# Altium PCB CR99004.PcbDoc
Units mm, origin at the board's own origin, x right, y up, seen from the top; angles counter-clockwise.
Board outline 18 x 32 mm, 4 copper layers (L 01, L 02, L 03, L 04), stack 2.023 mm thick; 12 components, 12 nets, 41 pads, 17 vias.
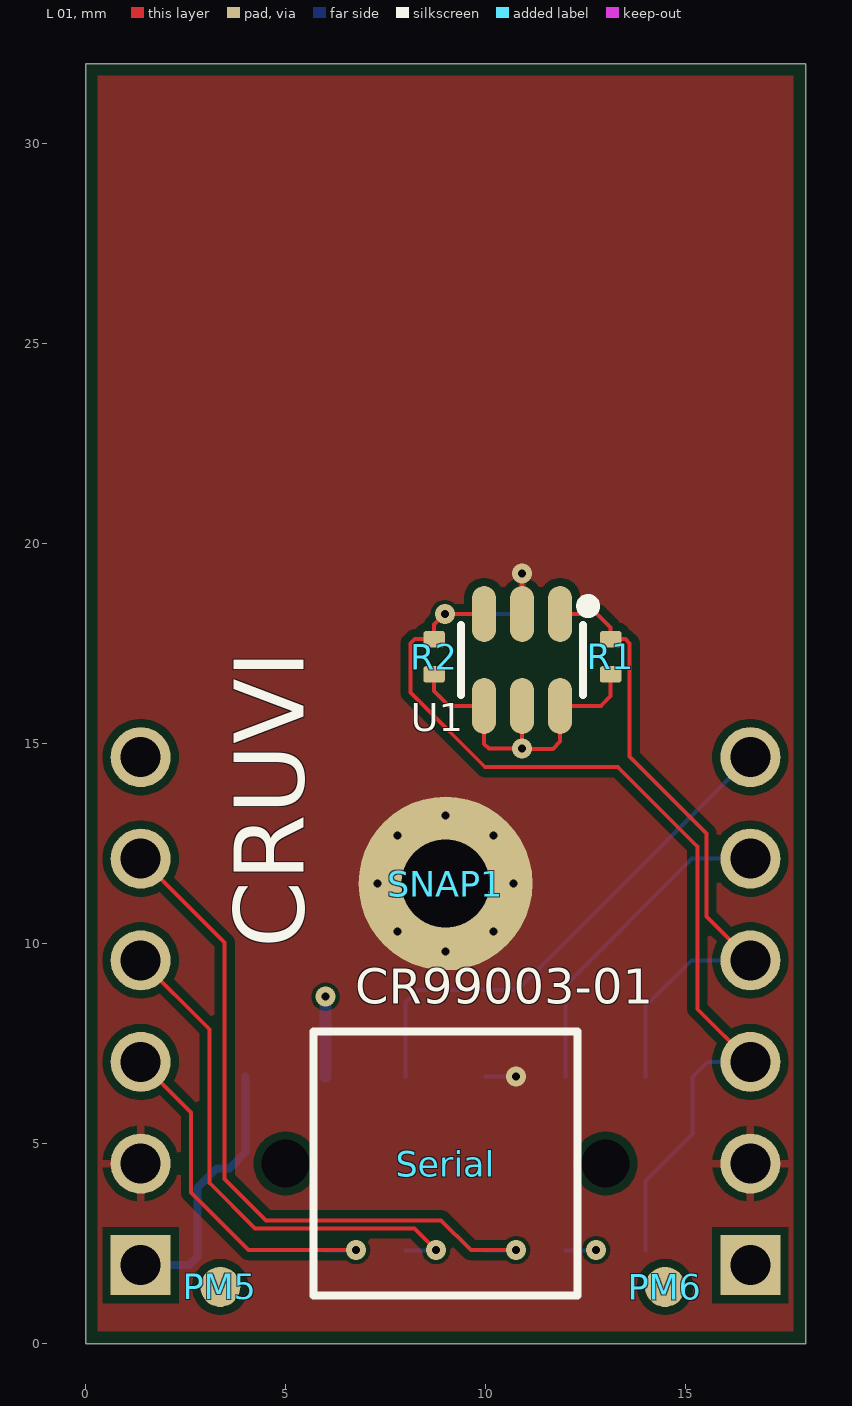
[diagram p0: L 01 view]
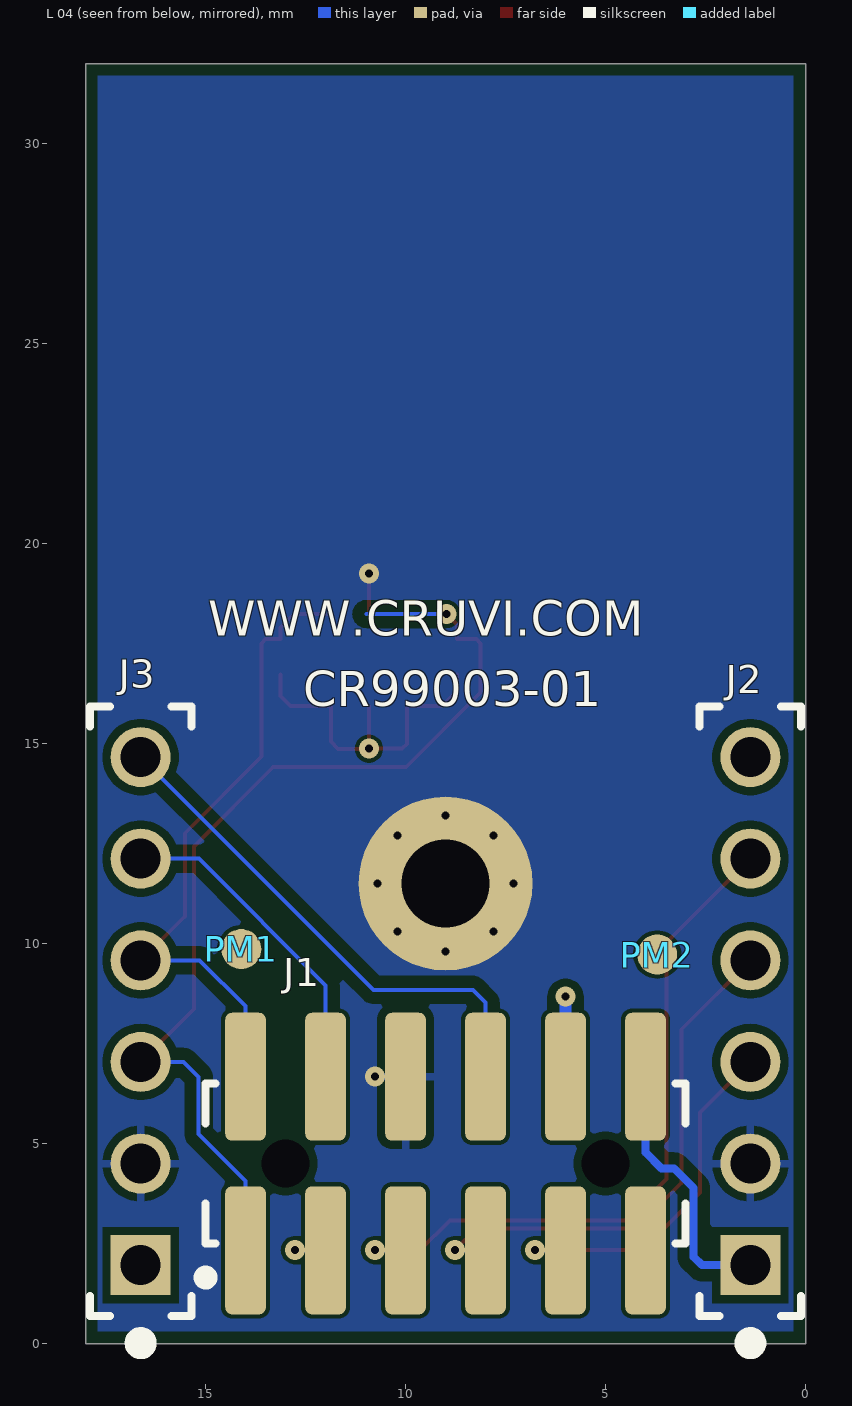
[diagram p1: L 04 view, seen from below]
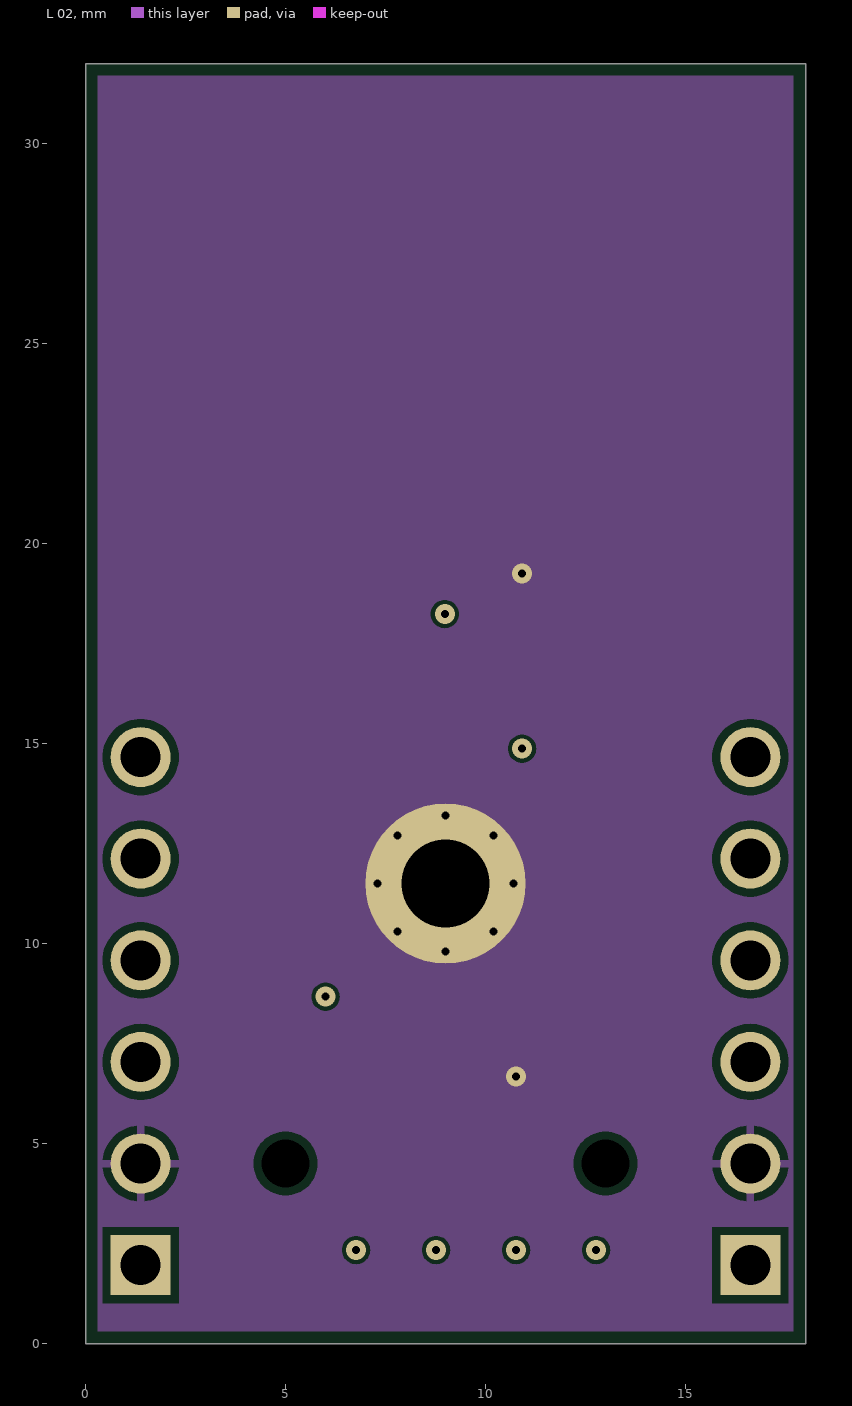
[diagram p2: L 02]
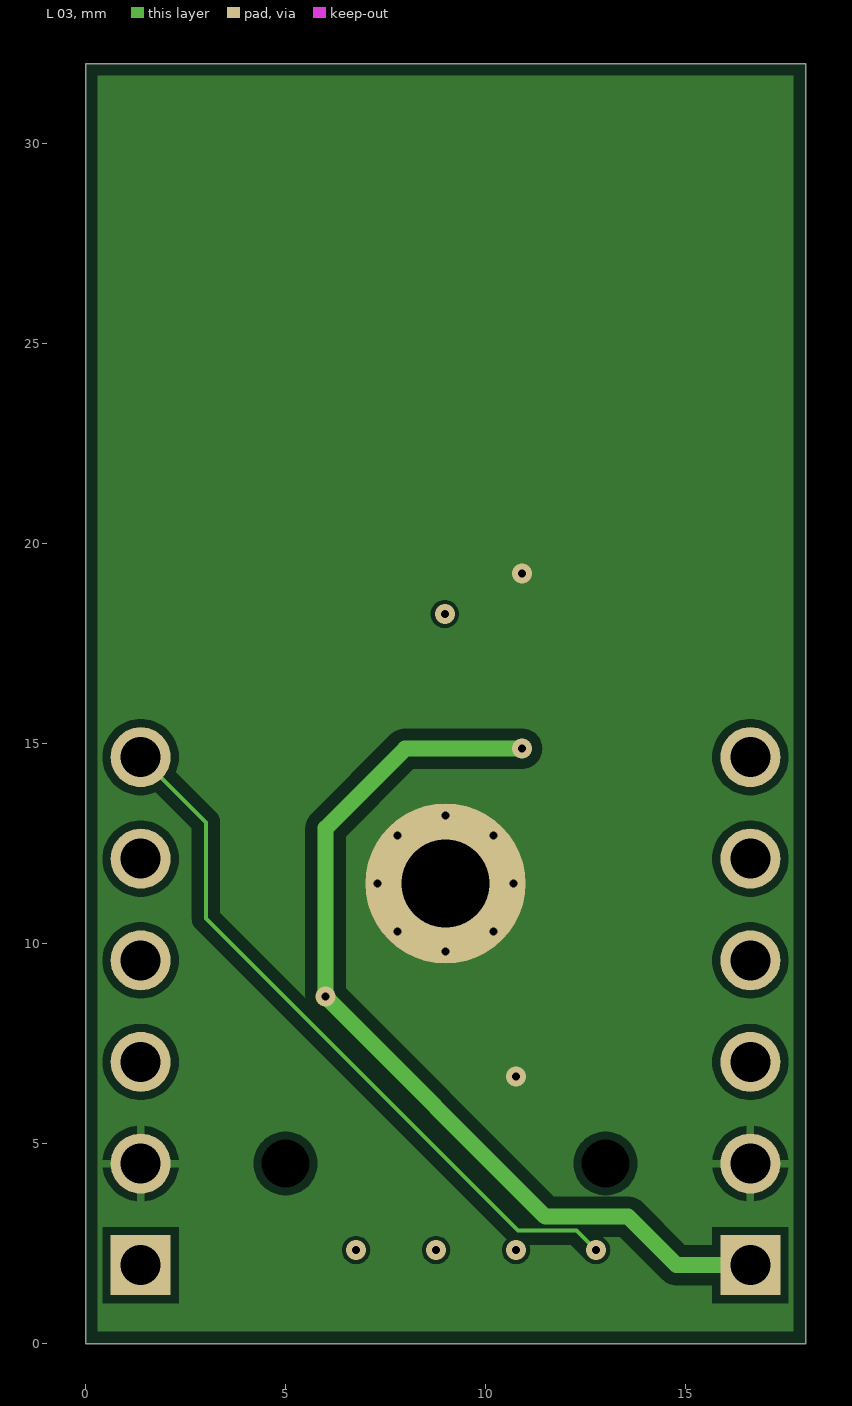
[diagram p3: L 03]
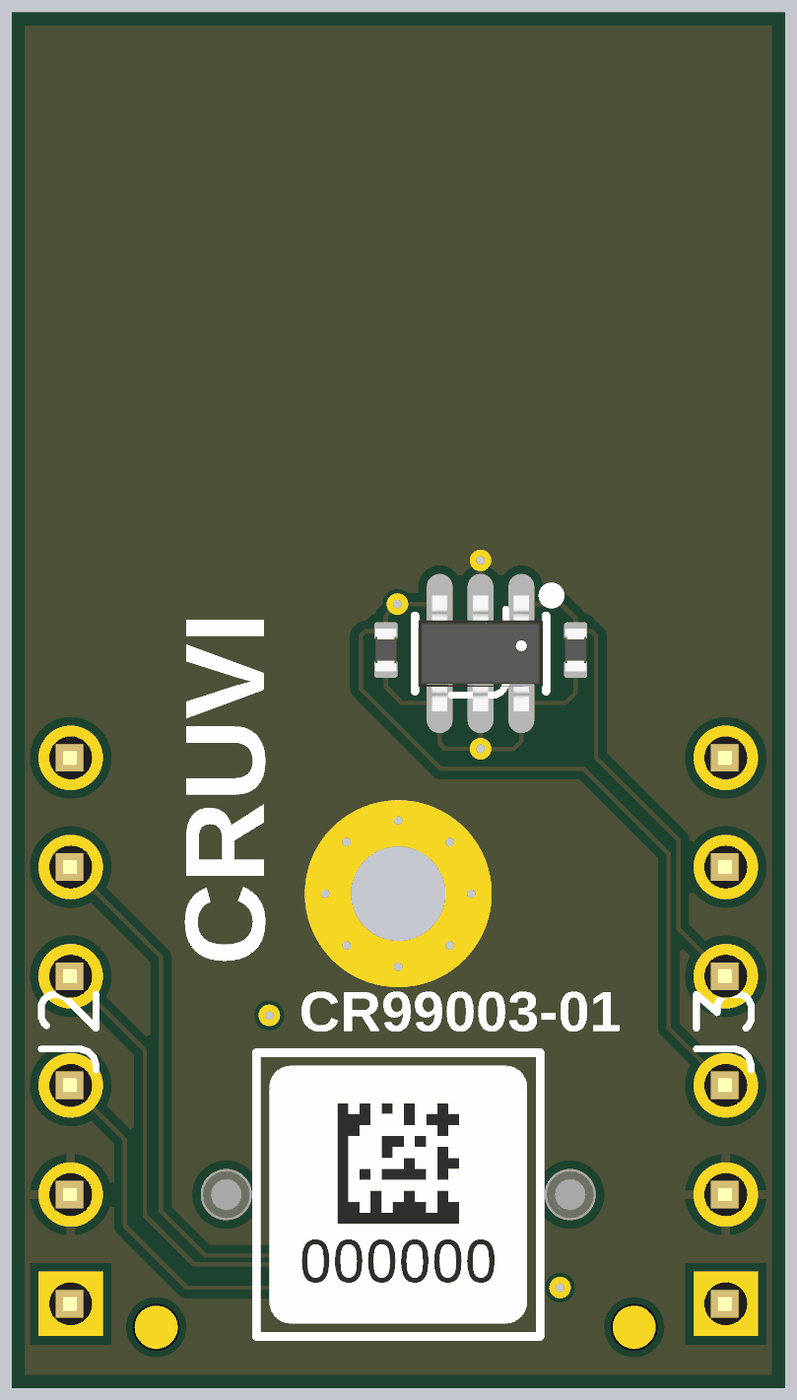
[diagram p4: 3D render of the assembled board from above, using the file's embedded part models]
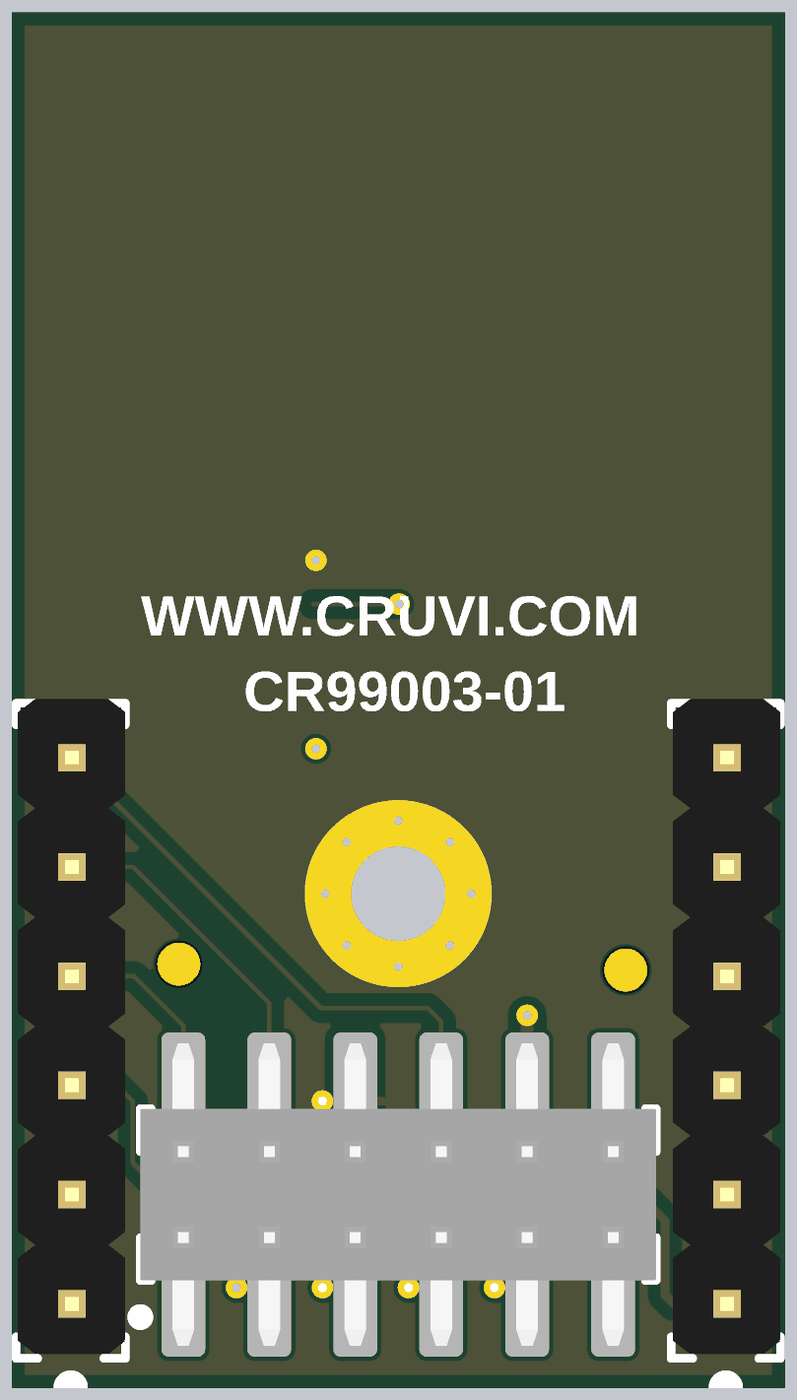
[diagram p5: 3D render of the assembled board from below, using the file's embedded part models]

## Layer stack, top to bottom
Top Solder: solder mask 0.035, Solder Resist, Dk 3.5
L 01: signal copper 0.035
Dielectric1: core 1.5, FR-4, Dk 4.2
L 02: signal copper 0.036
Dielectric 3: prepreg 0.127, Dk 4.2
L 03: signal copper 0.036
Dielectric 2: core 0.254, Dk 4.2
L 04: signal copper 0.035
Bottom Solder: solder mask 0.035, Solder Resist, Dk 3.5

## Board outline
0,0 18,0 18,32 0,32

## Design rules (kind name [scope] priority, off if disabled: settings)
BoardOutlineClearance [All] p1: gap=0.3
Clearance Clearance_topbotPoly [InPolygon vs (OnLayer('Multi-Layer') and IsPad) or OnLayer('L 01') or OnLayer('L 06')] p1: gap=0.2
Clearance [All] p2: gap=0.099 except(0.3: Track-Poly Poly-Poly Poly-Region)
ComponentClearance "ComponentClearance_J2PM\"" [(InComponent('J2')) vs (InComponent('PM2'))] p1: gap=-4 collisioncheckmode=3 verticalgap=-1 showdistances=FALSE
ComponentClearance ComponentClearance_H3U7 [(InComponent('H3')) vs (InComponent('U7'))] p2: gap=-0.5 collisioncheckmode=3 verticalgap=-1 showdistances=FALSE
ComponentClearance ComponentClearance_-0.5mm [HasFootprint('FIDU-DOT - small') OR HasFootprint('NetTieTOP_D35mm')or HasFootprint('MHole3_2mm')] p3: gap=-0.5 collisioncheckmode=3 verticalgap=-0.013 showdistances=FALSE
ComponentClearance [All] p4: gap=-0.05 collisioncheckmode=3 verticalgap=0.5 showdistances=TRUE
DiffPairsRouting DiffPairsRouting_D80 [InNetClass('DDR_D80')] p1: maxlimit=0.254 minlimit=0.1 mostfreqgap=0.254 toplayer_mingap=0.12 toplayer_prefgap=0.12 toplayer_minwidth=0.09 toplayer_maxwidth=0.381 toplayer_prefwidth=0.09 midlayer1_prefgap=0.1 midlayer1_minwidth=0.11 midlayer1_maxwidth=0.381 midlayer1_prefwidth=0.11 midlayer2_mingap=0.254 midlayer2_minwidth=0.381 midlayer2_maxwidth=0.381 midlayer2_prefwidth=0.381 bottomlayer_mingap=0.12 bottomlayer_prefgap=0.12 bottomlayer_minwidth=0.09 bottomlayer_maxwidth=0.381 bottomlayer_prefwidth=0.09 maxuncoupledlength=12.7
DiffPairsRouting [All] p2: maxlimit=1 minlimit=0.12 mostfreqgap=1 toplayer_maxgap=0.12 toplayer_prefgap=0.12 toplayer_minwidth=0.1 toplayer_maxwidth=0.15 toplayer_prefwidth=0.1 midlayer1_mingap=0.16 midlayer1_maxgap=0.16 midlayer1_prefgap=0.16 midlayer1_minwidth=0.1 midlayer1_maxwidth=0.11 midlayer1_prefwidth=0.1 midlayer2_mingap=1 midlayer2_minwidth=0.381 midlayer2_maxwidth=0.381 midlayer2_prefwidth=0.381 bottomlayer_maxgap=0.12 bottomlayer_prefgap=0.12 bottomlayer_minwidth=0.1 bottomlayer_maxwidth=0.3 bottomlayer_prefwidth=0.1 maxuncoupledlength=30
FabricationTestPointUsage TestPointUsage [All] p1: valid=0 allowmultiple=FALSE
FabricationTestpoint Testpoint [(IsPad And (OnTopLayer Or OnBottomLayer))] p1: side=3 testpointundercomponent=TRUE minsize=1.016 maxsize=2.54 preferedsize=1.524 minholesize=0 maxholesize=1.016 preferedholesize=0.813 testpointgrid=0.025 allowsidetop=TRUE allowsidebottom=TRUE usegrid=TRUE gridtolerance=0
FanoutControl Fanout_Small [All] p1 off: bgadir=Out bgaviamode=Centered fanoutstyle=Auto fanoutdirection=Alternating viagrid=0.025 // Protel DXP Scope 1 Expression Was: (CompPinCount < 5)   Fanout_Small (Default Rule)
FanoutControl Fanout_Default [All] p2: bgadir=Out bgaviamode=Centered fanoutstyle=Auto fanoutdirection=Alternating viagrid=0.025 // Fanout_Default (Default Rule)
FanoutControl Fanout_SOIC [All] p3 off: bgadir=Out bgaviamode=Centered fanoutstyle=Auto fanoutdirection=Alternating viagrid=0.025 // Protel DXP Scope 1 Expression Was: IsSOIC   Fanout_SOIC (Default Rule)
FanoutControl Fanout_BGA [All] p4 off: bgadir=Out bgaviamode=Centered fanoutstyle=Auto fanoutdirection=Alternating viagrid=0.025 // Protel DXP Scope 1 Expression Was: IsBGA   Fanout_BGA (Default Rule)
FanoutControl Fanout_LCC [All] p5 off: bgadir=Out bgaviamode=Centered fanoutstyle=Auto fanoutdirection=Alternating viagrid=0.025 // Protel DXP Scope 1 Expression Was: IsLCC   Fanout_LCC (Default Rule)
HoleSize [All] p1: absolutevalues=TRUE maxlimit=4 minlimit=0.2 maxpercent=80.000 minpercent=20.000
Length Lendht22mm [(InDifferentialPairClass('Lendht22mm'))] p1: maxlimit=22.2 minlimit=21.8
MinimumAnnularRing [All] p1: minimumring=0.124
MinimumSolderMaskSliver [All] p1: minsoldermaskwidth=0.2
PermittedLayers PermittedLayers-CAP3225 [(HasFootprint('CAPC3216N'))] p1: toplayerpermitted=TRUE bottomlayerpermitted=FALSE
PlaneClearance [All] p1: clearance=0.25
PlaneConnect PlaneConnect_Via [IsVia] p1: planeconnectstyle=Direct reliefexpansion=0.508 reliefentries=4 reliefconductorwidth=0.254 reliefairgap=0.254
PlaneConnect [All] p2: planeconnectstyle=Relief reliefexpansion=0.5 reliefentries=4 reliefconductorwidth=0.2 reliefairgap=0.25
PolygonConnect mhole [HoleSize > 2.1] p1: connectstyle=Direct reliefconductorwidth=0.254 reliefentries=4 polygonreliefangle="90 Angle" airgapwidth=0.254
PolygonConnect Direct_J2 [HasFootprint('STIFTLEISTE2_54 OG 1R-14')] p2: connectstyle=Relief reliefconductorwidth=0.254 reliefentries=4 polygonreliefangle="45 Angle" airgapwidth=0.254
PolygonConnect PolygonConnect_TopRilief [InPolygonClass('TopConnect')] p3: connectstyle=Relief reliefconductorwidth=0.254 reliefentries=4 polygonreliefangle="90 Angle" airgapwidth=0.2
PolygonConnect PolygonConnect_Direct [(HasFootprint('MHole2_7mm')) or IsVia or InComponent('H1') or InComponent('H2') or InComponent('H3') or InComponent('H4')] p4: connectstyle=Direct reliefconductorwidth=0.254 reliefentries=4 polygonreliefangle="90 Angle" airgapwidth=0.254 // Protel DXP Scope 1 Expression Was: IsVia
PolygonConnect PolygonConnect_Direct_TP [HasFootprint('TP_0.8mm')] p5: connectstyle=Direct reliefconductorwidth=0.254 reliefentries=4 polygonreliefangle="90 Angle" airgapwidth=0.254 // Protel DXP Scope 1 Expression Was: IsVia
PolygonConnect [All] p6: connectstyle=Relief reliefconductorwidth=0.2 reliefentries=4 polygonreliefangle="90 Angle" airgapwidth=0.2
RoutingLayers "RoutingLayers_impedance control" [(InDifferentialPairClass('All Differential Pairs') OR InNetClass('D100-15') OR InNetClass('D100-25') OR InNetClass('D100-33') OR InNetClass('S50') OR InNetClass('S50-25') OR InNetClass('S50-33') OR InNetClass('S60-15'))] p1: top layer_v5=TRUE mid layer 1_v5=TRUE mid layer 2_v5=TRUE bottom layer_v5=TRUE
RoutingLayers [All] p2: top layer_v5=TRUE mid layer 1_v5=TRUE mid layer 2_v5=TRUE bottom layer_v5=TRUE
RoutingVias [All] p1: holewidth=0.2 width=0.5 viastyle="Through Hole" minholewidth=0.2 minwidth=0.5 maxholewidth=1 maxwidth=1.5
SMDNeckDown SMDNeckDown_80% [All] p1: percent=95.000
SMDToPlane [All] p1: distance=39370
SilkToBoardRegionClearance [All] p1 off:
SilkToSilkClearance [All] p1: silktosilkclearance=0.01
SilkToSolderMaskClearance SilkscreenOverComponentPads [IsPad] p1: minsilkscreentomaskgap=0.01 clearancetoexposedcopper=TRUE
SolderMaskExpansion SolderMaskExpansion_Via [IsVia] p1: expansion=-0.15
SolderMaskExpansion [All] p2: expansion=0
Width Width_S40 [InNetClass('DDR_S40')] p1: maxlimit=0.254 minlimit=0.1 preferedwidth=0.254 toplayer_maxwidth=0.15 toplayer_prefwidth=0.15 midlayer1_maxwidth=0.18 midlayer1_prefwidth=0.18 midlayer2_minwidth=0.15 bottomlayer_maxwidth=0.15 bottomlayer_prefwidth=0.15 minimp=50.000000 maximp=50.000000 favimp=50.000000
Width Logo [(InComponent('LOGO*'))] p2: maxlimit=0.254 minlimit=0.001 preferedwidth=0.254 // Protel DXP Scope 1 Expression Was: (InComponent('LOGO?'))
Width All [All] p3: maxlimit=3 minlimit=0.1 preferedwidth=0.1 minimp=50.000000 maximp=50.000000 favimp=50.000000
13 further rules are at their usual default settings.

## Classes and differential pairs
component class CR99003: J1 J2 J3 PM1 PM2 PM5 PM6 R1 R2 Serial SNAP1

## Components (designator, comment, footprint, x,y, rotation, side; value= is the part's Value field where it differs from the comment)
J1 "TMMH-106-04-F-DV-A-M" TMMH-106-04-T-DV-A 9,4.5 r180 bottom locked
J2 "Pin Header 2.54 1Row 6Pins" "STIFTLEISTE2_54 OG 1R-6" 1.38,8.31 r90 bottom
J3 "Pin Header 2.54 1Row 6Pins" "STIFTLEISTE2_54 OG 1R-6" 16.62,8.31 r90 bottom
PM1 "FIDU-DOT - mini" "FIDU-DOT - mini" 14.105,9.861 r180 bottom
PM2 "FIDU-DOT - mini" "FIDU-DOT - mini" 3.707,9.724 r180 bottom
PM5 "FIDU-DOT - mini" "FIDU-DOT - mini" 3.369,1.415 r0 top
PM6 "FIDU-DOT - mini" "FIDU-DOT - mini" 14.488,1.415 r0 top
R1 "4K7" RESC1005X40N_V 13.129,17.168 r180 top
R2 "4K7" RESC1005X40N_V 8.715,17.168 r180 top
Serial "Serialnumber 6,3 x 6.3mm" Serial_6.3x6.3mm 9,4.5 r0 top
SNAP1 "BMS_LS1H" BMS_LS1H 9,11.5 r0 top locked
U1 "24AA025E48T-I/OT" SOT95P280X145-6N 10.914,17.087 r270 top

## Footprints (in the part's own frame and the unit in brackets; to place one, negate y for a bottom-side part, rotate by r counter-clockwise, add the part's x,y. Pads: shape width x height; smd on the part's side, far side on the other; paste and mask are expansions set on the pad)
BMS_LS1H [mm]
  round 4.35 / inner round 4 / far side round 4.35 hole 2.2: 1(0,0)
"FIDU-DOT - mini" [mm]
  round 1 smd paste-1: 0(0,0)
RESC1005X40N_V [mm] "Vishay D0402 1 x 0.5mm (+/- 0.05), 0.2mm +/-0.1mm Kontakte"
  rrect33% 0.54x0.41 smd: 1(0,0.44) 2(0,-0.44)
  body extent -0.25,-0.5 0.25,0.5, height 0.4
Serial_6.3x6.3mm [mm]
  silkscreen extent -3.3,-3.3 3.3,3.3, body extent -3,-3 3,3, height 0.21
SOT95P280X145-6N [mm]
  oval 1.4x0.6 smd: 1(-1.15,0.95) 2(-1.15,0) 3(-1.15,-0.95) 4(1.15,-0.95) 5(1.15,0) 6(1.15,0.95)
  silkscreen extent -1.5,-1.53 0.87,1.8, body extent -1.35,-1.45 1.35,1.45, height 1.45
"STIFTLEISTE2_54 OG 1R-6" [mm]
  rect 1.5x1.5 hole 1: 1(-6.35,0)
  round 1.5 hole 1: 2(-3.81,0) 3(-1.27,0) 4(1.27,0) 5(3.81,0) 6(6.35,0)
  silkscreen extent -8.5,-1.27 7.62,1.27, body extent -7.52,-1.27 7.72,1.23, height 8.2
TMMH-106-04-T-DV-A [mm]
  rrect33% 1.016x3.2 smd: 1(-5,-2.17) 2(-5,2.17) 3(-3,-2.17) 4(-3,2.17) 5(-1,-2.17) 6(-1,2.17) 7(1,-2.17) 8(1,2.17) 9(3,-2.17) 10(3,2.17) 11(5,-2.17) 12(5,2.17)
  round 0 hole 1.19 unplated: H1(-4,0) H2(4,0)
  silkscreen extent -6.15,-3 6,2, body extent -6,-3.52 6,3.52, height 4.42

## Part data
J1: library part 28976
J2 J3: library part 28042, "Stiftleiste gerade 1-reihig, 6pol"
PM1 PM2 PM5 PM6: library part 27037, "FIDU-DOT - MINI 0.5mm"
R1 R2: library part 22585, "WID SMD 4K7 1% 0,063W BF 1005 (0402)"
Serial: library part 26753
U1: library part 26249

## Via types
v1: diameter 0.5, hole 0.2, L 01 to L 04, 17 vias

## Nets (pads, with @x,y where several pads share a name; then routed paths per layer and width w, separated by ;. In a path a pad name is that pad's centre, name@x,y a point inside that pad or via, vN(x,y) a via of type N, cw(c..) or ccw(c..) an arc to the next point about the centre after c; other vN are vias at no path point)
CLK: J1.8 J3.6 | length 13
  L 04 w0.1: J1.8 8,8.524 8.317,8.841 10.801,8.841 J3.6
D0: J1.9 J2.3 | length 9.3
  L 01 w0.1: J2.3 2.64,5.78 2.64,3.774 4.078,2.336 v1(6.763,2.336)
  L 04 w0.1: J1.9 6.757,2.33 v1(6.763,2.336)
D1: J1.7 J2.4 | length 13.4
  L 01 w0.1: J2.4 3.103,7.857 3.103,4.019 4.243,2.88 8.219,2.88 v1(8.763,2.336)
  L 04 w0.1: J1.7 8.757,2.33 v1(8.763,2.336)
D2: J1.5 J2.5 | length 17.7
  L 01 w0.1: J2.5 3.478,10.022 3.478,4.112 4.511,3.079 8.891,3.079 9.634,2.336 v1(10.763,2.336)
  L 04 w0.1: J1.5 10.757,2.33 v1(10.763,2.336)
D3: J1.3 J2.6 | length 18.7
  L 03 w0.1: J2.6 3.011,13.029 3.011,10.621 10.809,2.824 12.275,2.824 v1(12.763,2.336)
  L 04 w0.1: J1.3 12.757,2.33 v1(12.763,2.336)
GND: J1.6 J2.2 J3.2 SNAP1.1 U1.2 | length 1.8
  L 01 w0.1: U1.2 v1(10.914,19.255)
  L 04 w0.1: J1.6 10.757,6.67 v1(10.763,6.676)
  other v1: 9,9.8 7.798,10.298 10.202,10.298 7.3,11.5 10.7,11.5 7.798,12.702 10.202,12.702 9,13.2
RFU: J1.11
SCL: J1.2 J3.4 R1.2 U1.1 | length 16.2
  L 01 w0.1: U1.1 12.791,18.237 13.129,17.899 R1.2 13.497,17.608 13.6,17.505 13.6,14.671 15.519,12.753 15.519,10.681 J3.4
  L 04 w0.1: J1.2 14,8.433 15.147,9.58 J3.4
SDA: J1.1 J3.3 R2.2 U1.3 | length 26.7
  L 01 w0.1: U1.3 v1(8.981,18.237) 8.715,17.971 R2.2 8.231,17.608 8.127,17.504 8.127,16.273 9.993,14.407 13.313,14.407 15.293,12.427 15.293,8.367 J3.3
  L 04 w0.1: v1(8.981,18.237) 10.975,18.237 ; J1.1 14,4.063 15.173,5.236 15.173,6.665 15.548,7.04 J3.3
SEL: J1.4 J3.5 | length 8.2
  L 04 w0.1: J1.4 12,8.955 15.165,12.12 J3.5
VBUS: J1.12 J2.1 | length 6.7
  L 04 w0.2: J2.1 2.591,1.96 2.795,2.164 2.795,3.889 3.283,4.377 3.597,4.377 4,4.779 J1.12
VCC: J1.10 J3.1 R1.1 R2.1 U1.4 U1.5 U1.6 | length 34
  L 01 w0.1: R2.1 8.715,16.308 9.086,15.937 U1.4 9.964,14.991 10.083,14.872 v1(10.914,14.872) ; U1.5 v1(10.914,14.872) ; R1.1 13.129,16.185 12.881,15.937 U1.6 11.864,15.048 11.684,14.868 10.918,14.868 v1(10.914,14.872)
  L 03 w0.4: v1(10.914,14.872) 7.99,14.872 6,12.882 v1(6,8.67) 11.497,3.173 13.564,3.173 14.776,1.96 J3.1
  L 04 w0.3: J1.10 v1(6,8.67)
pads on no net: J1.H1 J1.H2 PM1.0 PM2.0 PM5.0 PM6.0

## Polygon pours and split planes (outlines as drawn)
GND on L 02 "GND_L02_P000" (solid, remove dead copper, pour order 0): 0,0 0,32 18,32 18,0
GND on L 03 "GND_L03_P002" (solid, remove dead copper, pour order 2): -0.1,0.1 -0.1,32.1 17.9,32.1 17.9,0.1
GND on L 01 "GND" (solid, remove dead copper, pour order 3): 0,31.993 0.035,31.958 17.99,31.958 17.99,0.032 18.011,0.012 17.95,-0.049 0.046,-0.049
GND on L 04 "GND" (solid, remove dead copper, pour order 5): 0,31.809 17.94,31.809 18,31.869 18,0 0.06,0 0,0.06

## Other copper
L 01:
  pour cut-out: 8.715,17.168 8.895,17.168 9.964,18.237 12.5,18.237 13.129,17.608 13.129,16.728 12.655,16.728 11.864,15.937 9.964,15.937

## Silkscreen, mask and mechanical layers (free items; w line width, h text height)
Top Overlay:
  text "CRUVI" at 6.034,9.877 h3 r90
  text "CR99003-01" at 6.744,8.202 h1.5
Bottom Overlay:
  text "WWW.CRUVI.COM" at 14.934,17.404 h1.5
  text "CR99003-01" at 12.551,15.65 h1.5
Dim-Top-GM1:
  text "Top View" at 1.649,37.299 h2
Dim-Bot-GM2:
  text "Top View" at 1.649,37.299 h2
PCB-Outline-GM6:
  the board outline again, w0.1
Assembly Top-GM13:
  text "'.Project'-'.Revision'-'.VariantName'" at 8.184,43.865 h1.5
  text "Variant name:" at -7.816,43.794 h1.5
  text "Top View" at 1.649,37.303 h2
Assembly Bot-GM14:
  text "'.Project'-'.Revision'-'.VariantName'" at 15.164,43.865 h1.5
  text "Variant name:" at 31.164,43.794 h1.5
  text "Bottom View" at 19.191,37.226 h2

## Dimensions
0,0 to 9,11.5 on Dim-Top-GM1
9,4 to 16.62,1.96 on Dim-Top-GM1
5,4.5 to 1.38,1.96 on Dim-Top-GM1
1.38,1.96 to 9,4 on Dim-Top-GM1
18,0 to 18,32 on Dim-Top-GM1
0,0 to 18,0 on Dim-Top-GM1
18,0 to 9,11.5 on Dim-Top-GM1
9,11.5 to 18,32 on Dim-Top-GM1
13,4.5 to 9,11.5 on Dim-Top-GM1

## Text inside footprints (layer, text, board x,y; h text height)
J1: Assembly Bot-GM14 "2" at 14.25,5.6 h0.5; Assembly Bot-GM14 "1" at 14.1,2.85 h0.5; Assembly Bot-GM14 "12" at 4.45,5.6 h0.5; Assembly Bot-GM14 "11" at 4.35,2.85 h0.5
J2: Assembly Bot-GM14 "1" at 0.855,-0.165 h1 r270; Assembly Bot-GM14 "6" at 0.83,16.285 h1 r270
J3: Assembly Bot-GM14 "1" at 16.095,-0.165 h1 r270; Assembly Bot-GM14 "6" at 16.07,16.285 h1 r270
Serial: Assembly Top-GM13 "SerialNr" at 6.5,2 h0.7